# EAGLE board Spresense_PLC _Rev1-01 (EAGLE 9.6.2)
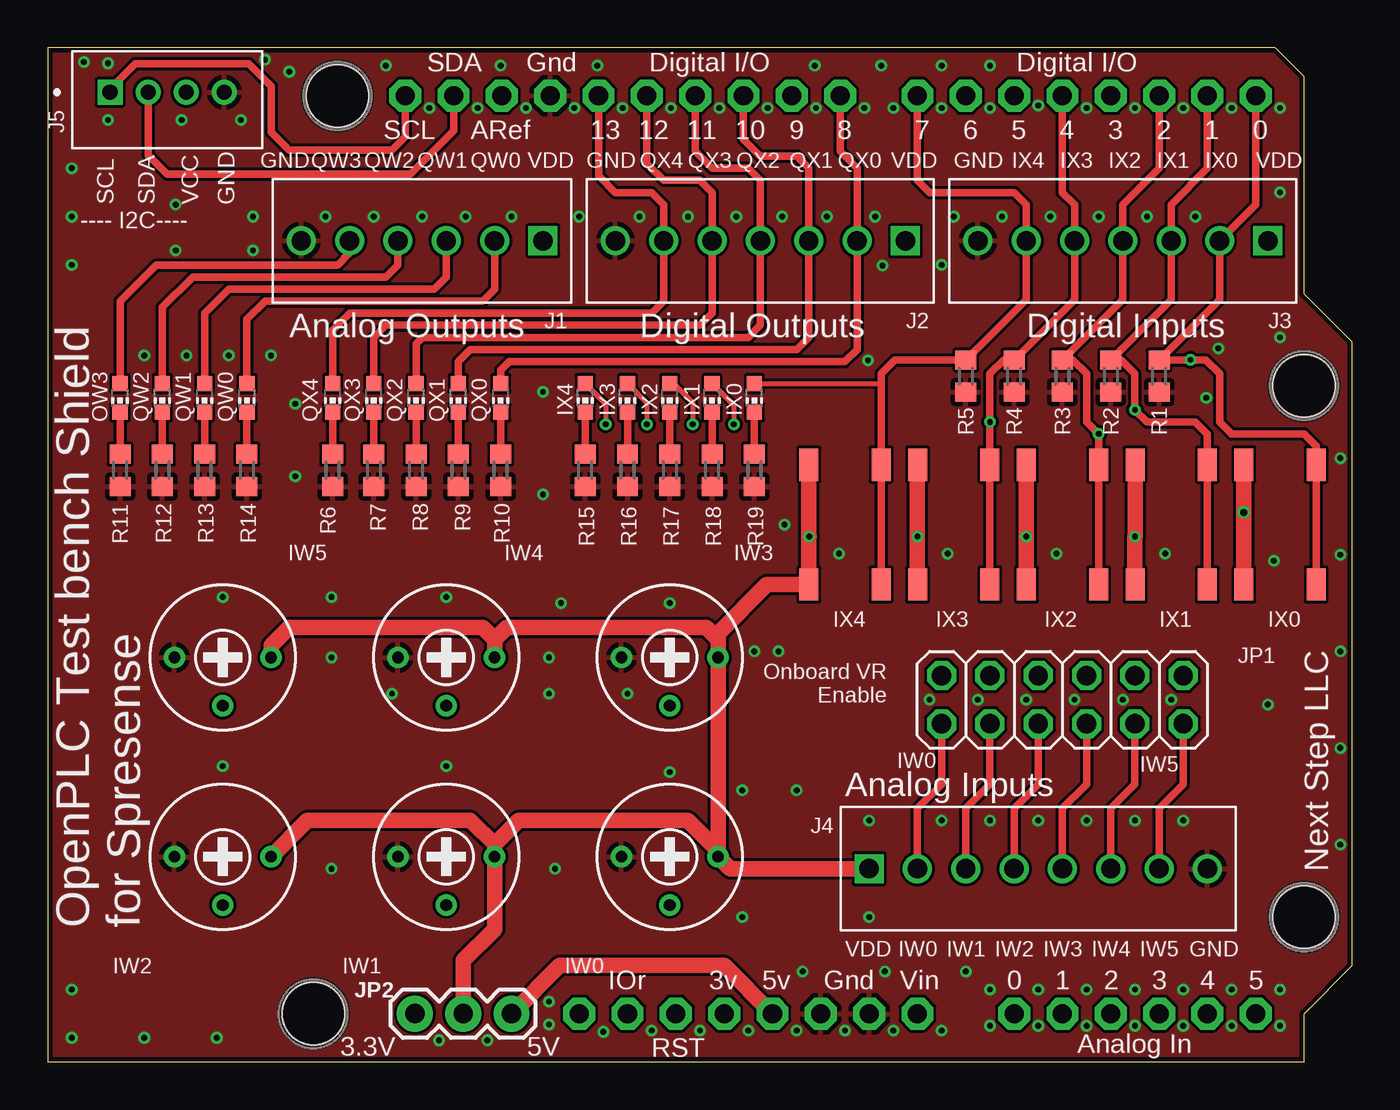
[diagram p0: board, top side]
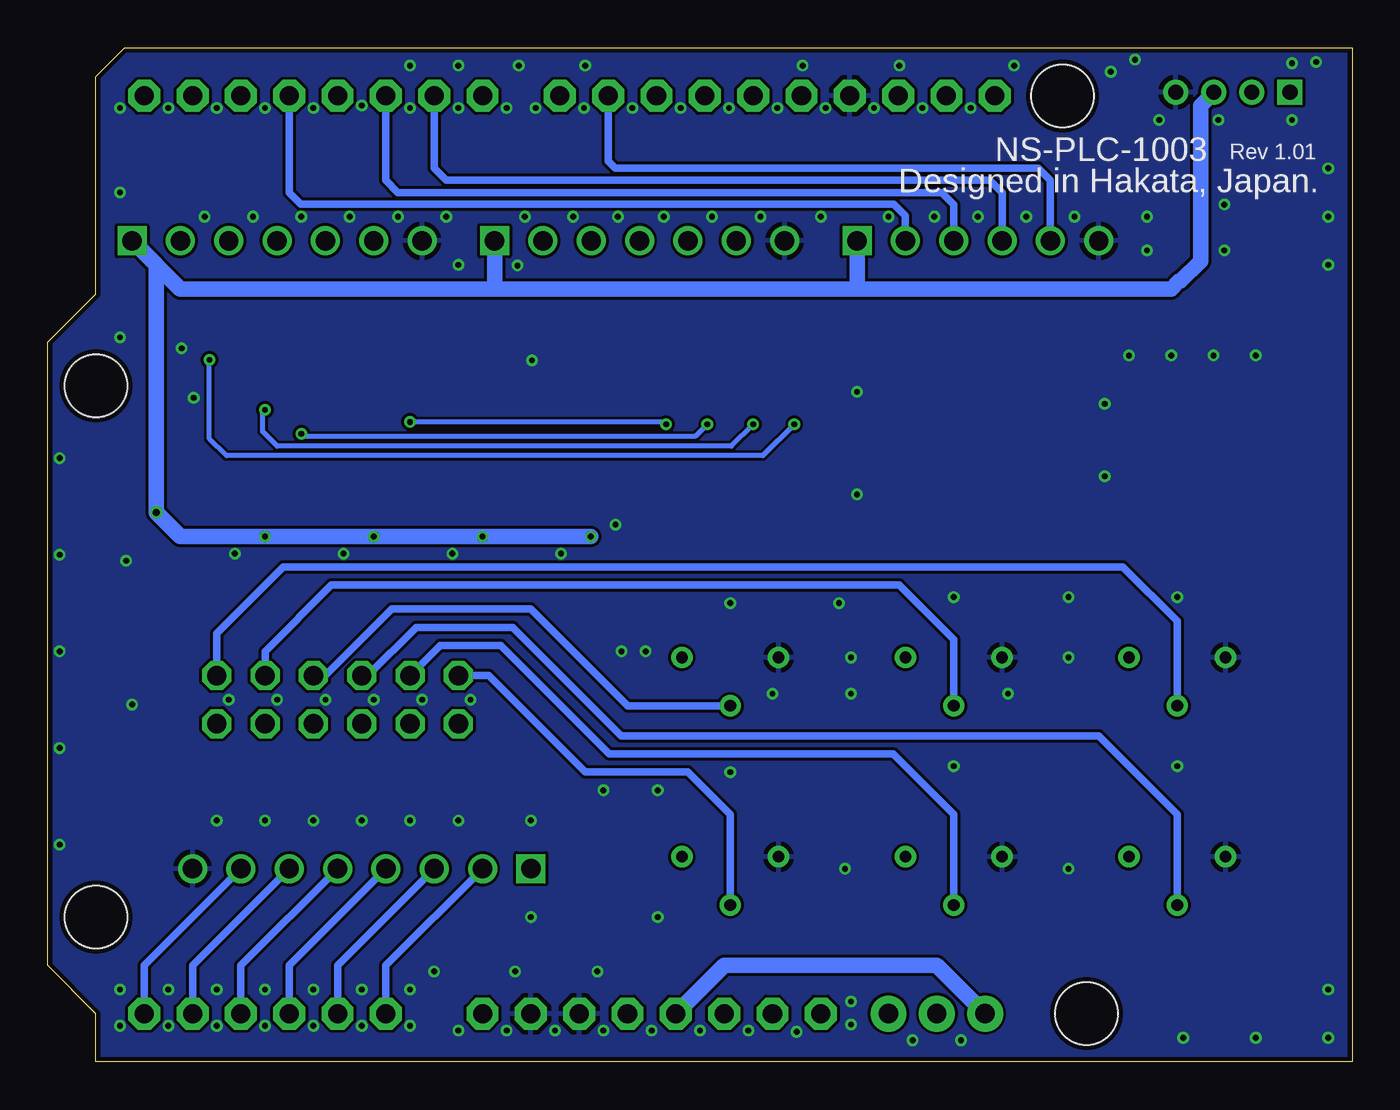
[diagram p1: board, bottom side, seen from below]

Size 68.58 x 53.34 mm. Coordinates in mm from the lower left corner, seen from the top.
Copper layers (1*16): Top 0.035mm / dielectric 1.5mm / Bottom 0.035mm
Design rules "SeeedStudio_2layer_DRU_no_angle_20140221": minimum track width 6mil, minimum drill 12mil, track to track 6mil, track to pad 6mil, pad to pad 6mil, via to via 6mil, smd to smd 0mil, copper to edge 10mil, drill to drill 10mil, minimum pad ring 10mil, minimum via ring 6mil, stop-mask expansion 2mil, vias tented up to drill 100mil, thermal gap 10mil
Holes 3.3 mm at 15.24,50.8 13.97,2.54 66.04,7.62 66.04,35.56

## Footprints (pad centres in the part's own frame; a part is rotated, then mirrored left to right if it is on the bottom)
CHIP-LED0603 = smd 0.8 x 0.8: A 0,-0.75; C 0,0.75
TE_282834-6 = drill 1.016 square: 1 -6.35,0 | drill 1.016: 2 -3.81,0; 3 -1.27,0; 4 1.27,0; 5 3.81,0; 6 6.35,0
TE_282834-7 = drill 1.016 square: 1 -7.62,0 | drill 1.016: 2 -5.08,0; 3 -2.54,0; 4 0,0; 5 2.54,0; 6 5.08,0; 7 7.62,0
HDRV8W85P254_8X1_2078X650X1000 = drill 1.016 square: 1 0,0 | drill 1.016: 2 2.54,0; 3 5.08,0; 4 7.62,0; 5 10.16,0; 6 12.7,0; 7 15.24,0; 8 17.78,0
SEEED_110990030 = drill 0.8 square: 1 -3,0 | drill 0.8: 2 -1,0; 3 1,0; 4 3,0
2X06 = drill 1.016 octagon: 1 -6.35,-1.27; 2 -6.35,1.27; 3 -3.81,-1.27; 4 -3.81,1.27; 5 -1.27,-1.27; 6 -1.27,1.27; 7 1.27,-1.27; 8 1.27,1.27; 9 3.81,-1.27; 10 3.81,1.27; 11 6.35,-1.27; 12 6.35,1.27
1X03 = drill 1.016 pad 1.88: 1 0,0; 2 2.54,0; 3 5.08,0
R0603 = smd 1 x 1.1: 1 -0.85,0; 2 0.85,0
SW_TL3342F160QG/TR = smd 1.7 x 1: 1 -3.15,-1.9; 2 3.15,-1.9; 3 -3.15,1.9; 4 3.15,1.9
ARDUINOR3 = drill 1 pad 1.676 octagon: 3V 35.56,2.54; 5V 38.1,2.54; A0 50.8,2.54; A1 53.34,2.54; A2 55.88,2.54; A3 58.42,2.54; A4 60.96,2.54; A5 63.5,2.54; AREF 23.876,50.8; D0 63.5,50.8; D1 60.96,50.8; D2 58.42,50.8; D3 55.88,50.8; D4 53.34,50.8; D5 50.8,50.8; D6 48.26,50.8; D7 45.72,50.8; D8 41.656,50.8; D9 39.116,50.8; D10 36.576,50.8; D11 34.036,50.8; D12 31.496,50.8; D13 28.956,50.8; GND 26.416,50.8; GND1 43.18,2.54; GND2 40.64,2.54; IOREF 30.48,2.54; RESERVED 27.94,2.54; RESET 33.02,2.54; SCL 18.796,50.8; SDA 21.336,50.8; VIN 45.72,2.54
RTRIM3339P = drill 0.61: 1 -2.54,0; 2 0,-2.54; 3 2.54,0

## Placement (x,y rotation side)
IX0  [CHIP-LED0603]  37.15,34.92 180 top
IX1  [CHIP-LED0603]  34.92,34.92 180 top
IX2  [CHIP-LED0603]  32.7,34.92 180 top
IX3  [CHIP-LED0603]  30.48,34.92 180 top
IX4  [CHIP-LED0603]  28.26,34.92 180 top
J1  282834-6  [TE_282834-6]  19.68,43.18 180 top
J2  282834-7  [TE_282834-7]  37.47,43.18 180 top
J3  282834-7  [TE_282834-7]  56.52,43.18 180 top
J4  282834-8  [HDRV8W85P254_8X1_2078X650X1000]  43.18,10.16 0 top
J5  110990030  [SEEED_110990030]  6.29,50.99 0 top
JP1  [2X06]  53.34,19.05 0 top
JP2  455-1750-1-ND  [1X03]  24.38,2.54 180 top
LED1  [CHIP-LED0603]  17.14,34.92 180 top
LED2  [CHIP-LED0603]  19.37,34.92 180 top
LED3  [CHIP-LED0603]  21.59,34.92 180 top
LED4  [CHIP-LED0603]  23.81,34.92 180 top
LED5  [CHIP-LED0603]  6.03,34.92 180 top
LED6  [CHIP-LED0603]  8.26,34.92 180 top
LED7  [CHIP-LED0603]  10.48,34.92 180 top
OW3  [CHIP-LED0603]  3.81,34.92 180 top
QX4  [CHIP-LED0603]  14.99,34.92 180 top
R1  10k  [R0603]  58.42,36.07 90 top
R2  10k  [R0603]  55.88,36.07 90 top
R3  10k  [R0603]  53.34,36.07 90 top
R4  10k  [R0603]  50.8,36.07 90 top
R5  10k  [R0603]  48.26,36.07 90 top
R6  1k  [R0603]  14.99,31.11 270 top
R7  1k  [R0603]  17.14,31.11 270 top
R8  1k  [R0603]  19.37,31.11 270 top
R9  1k  [R0603]  21.59,31.11 270 top
R10  1k  [R0603]  23.81,31.11 270 top
R11  330  [R0603]  3.81,31.11 270 top
R12  330  [R0603]  6.03,31.11 270 top
R13  330  [R0603]  8.26,31.11 270 top
R14  330  [R0603]  10.48,31.11 270 top
R15  1k  [R0603]  28.26,31.11 90 top
R16  1k  [R0603]  30.48,31.11 90 top
R17  1k  [R0603]  32.7,31.11 90 top
R18  1k  [R0603]  34.92,31.11 90 top
R19  1k  [R0603]  37.15,31.11 90 top
SW1  TL3342F160QG/TR  [SW_TL3342F160QG/TR]  64.77,28.26 90 top
SW2  TL3342F160QG/TR  [SW_TL3342F160QG/TR]  59.05,28.26 90 top
SW3  TL3342F160QG/TR  [SW_TL3342F160QG/TR]  53.34,28.26 90 top
SW4  TL3342F160QG/TR  [SW_TL3342F160QG/TR]  47.62,28.26 90 top
SW5  TL3342F160QG/TR  [SW_TL3342F160QG/TR]  41.91,28.26 90 top
U1  ARDUINOR3-DIMENSION  [ARDUINOR3]  0,0 0 top
VR1  50k  [RTRIM3339P]  9.21,21.27 0 top
VR2  50k  [RTRIM3339P]  20.95,21.27 0 top
VR3  50k  [RTRIM3339P]  32.7,21.27 0 top
VR4  50k  [RTRIM3339P]  9.21,10.79 0 top
VR5  50k  [RTRIM3339P]  20.95,10.79 0 top
VR6  50k  [RTRIM3339P]  32.7,10.79 0 top

## Library data of the parts
IX0 IX1-IX4 LED1-LED7 OW3 QX4 = led
J1 = 282834-6; AVAILABILITY: In Stock; COMMENT: 282834-6; DESCRIPTION: Wire-To-Board Terminal Block, 6, 150 V, 10 A, 30 Awg, 16 Awg, 1.4 Mm; EU_ROHS_COMPLIANCE: Compliant with Exemptions; MF: TE Connectivity; MP: 282834-6; PACKAGE: None; PRICE: None; PURCHASE-URL: https://pricing.snapeda.com/search/part/282834-6/?ref=eda
J2 J3 = 282834-7; AVAILABILITY: In Stock; COMMENT: 282834-7; DESCRIPTION: TERMI-BLOK PCB MOUNT, 90 7P.; EU_ROHS_COMPLIANCE: Compliant with Exemptions; MF: TE Connectivity; MP: 282834-7; PACKAGE: None; PRICE: None; PURCHASE-URL: https://pricing.snapeda.com/search/part/282834-7/?ref=eda
J4 = 282834-8; AVAILABILITY: In Stock; COMMENT: 282834-8; DESCRIPTION: Buchanan; Conn; Term Blk; PCB; 8; 2.54mm; Front; 30-16 AWG; Green; 10 A; 150 V; EU_ROHS_COMPLIANCE: Compliant with Exemptions; MF: TE Connectivity; MP: 282834-8; PACKAGE: None; PRICE: None; PURCHASE-URL: https://pricing.snapeda.com/search/part/282834-8/?ref=eda
J5 = 110990030; AVAILABILITY: Good; DESCRIPTION: GROVE 2MM 4PIN VERT CONN 10PCS; MF: Seeed Technology Co., Ltd; MP: 110990030; PACKAGE: None; PRICE: None; PURCHASE-URL: https://pricing.snapeda.com/search/part/110990030/?ref=eda
JP1 = pinhead
JP2 = SparkFun-Connectors; PROD_ID: XXX-00000
R1-R19 = rcl; SPICEPREFIX: R
SW1-SW5 = TL3342F160QG_TR; AVAILABILITY: In Stock; DESCRIPTION: Tactile Switch SPST-NO Top Actuated Surface Mount; MF: E-Switch; MP: TL3342F160QG/TR; PACKAGE: None; PRICE: None; PURCHASE-URL: https://pricing.snapeda.com/search/part/TL3342F160QG/TR/?ref=eda
U1 = adafruit
VR1-VR6 = rcl; SPICEMODEL: X; SPICEPREFIXL: POT

## Nets
A0: J4.2 JP1.1 U1.A0
A1: J4.3 JP1.3 U1.A1
A2: J4.4 JP1.5 U1.A2
A3: J4.5 JP1.7 U1.A3
A4: J4.6 JP1.9 U1.A4
A5: J4.7 JP1.11 U1.A5
D0: IX4.A J3.2 R1.2 SW1.1 SW1.2 U1.D0
D1: IX3.A J3.3 R2.2 SW2.1 SW2.2 U1.D1
D2: IX2.A J3.4 R3.2 SW3.1 SW3.2 U1.D2
D5: IX1.A J3.5 R4.2 SW4.1 SW4.2 U1.D4
D6: IX0.A J3.6 R5.2 SW5.1 SW5.2 U1.D7
D8: J2.2 LED4.A U1.D8
D9: J1.5 OW3.A U1.D9
D10: J2.3 LED3.A U1.D10
D11: J2.4 LED2.A U1.D11
D12: J2.5 LED1.A U1.D12
D13: J2.6 QX4.A U1.D13
GND: J1.6 J2.7 J3.7 J4.8 J5.4 R1.1 R2.1 R3.1 R4.1 R5.1 R6.2 R7.2 R8.2 R9.2 R10.2 R11.2 R12.2 R13.2 R14.2 R15.1 R16.1 R17.1 R18.1 R19.1 U1.GND U1.GND1 U1.GND2 VR1.1 VR2.1 VR3.1 VR4.1 VR5.1 VR6.1
N$1: LED1.C R7.1
N$2: LED2.C R8.1
N$3: LED3.C R9.1
N$4: LED4.C R10.1
N$5: LED5.C R12.1
N$6: LED6.C R13.1
N$7: LED7.C R14.1
N$8: JP1.12 VR1.2
N$9: JP1.10 VR2.2
N$10: JP1.8 VR3.2
N$11: JP1.6 VR4.2
N$12: JP1.4 VR5.2
N$13: JP1.2 VR6.2
N$14: JP2.3 U1.3V
N$15: J1.2 LED7.A U1.D3
N$16: JP2.1 U1.5V
N$17: IX0.C R19.2
N$18: IX1.C R18.2
N$19: IX2.C R17.2
N$20: IX3.C R16.2
N$21: IX4.C R15.2
N$22: J1.3 LED6.A U1.D5
N$23: J1.4 LED5.A U1.D6
N$25: OW3.C R11.1
N$26: QX4.C R6.1
SCL: J5.1 U1.SCL
SDA: J5.2 U1.SDA
VCC: J1.1 J2.1 J3.1 J4.1 J5.3 JP2.2 SW1.3 SW1.4 SW2.3 SW2.4 SW3.3 SW3.4 SW4.3 SW4.4 SW5.3 SW5.4 VR1.3 VR2.3 VR3.3 VR4.3 VR5.3 VR6.3
VIN: U1.VIN

## Tracks (layer width: path | path; a pad name or v marks a point on that pad's centre or on a via)
A0
  Top 0.406: JP1.1 46.99,14.61 45.72,13.34 J4.2
  Bottom 0.406: J4.2 50.8,5.08 U1.A0
A1
  Top 0.406: JP1.3 49.53,14.61 48.26,13.34 J4.3
  Bottom 0.406: J4.3 53.34,5.08 U1.A1
A2
  Top 0.406: JP1.5 52.07,14.61 50.8,13.34 J4.4
  Bottom 0.406: J4.4 55.88,5.08 U1.A2
A3
  Top 0.406: JP1.7 54.61,14.61 53.34,13.34 J4.5
  Bottom 0.406: J4.5 58.42,5.08 U1.A3
A4
  Top 0.406: JP1.9 57.15,14.61 55.88,13.34 J4.6
  Bottom 0.406: J4.6 60.96,5.08 U1.A4
A5
  Top 0.406: JP1.11 59.69,14.61 58.42,13.34 J4.7
  Bottom 0.406: J4.7 63.5,5.08 U1.A5
D0  (via drill 0.3)
  Top 0.254: IX4.A 29.34,34.6 v29.34,33.53
  Top 0.406: U1.D0 63.5,45.09 J3.2 61.59,40.09 R1.2 v60.07,36.92 60.87,36.92 61.59,36.2 61.59,33.66 62.23,33.02 66.04,33.02 66.67,32.38 SW1.2 SW1.1
  Bottom 0.254: v29.34,33.53 30.99,31.88 59.18,31.88 60.07,32.77 v60.07,36.92
D1  (via drill 0.3)
  Top 0.254: IX3.A 31.5,34.66 v31.5,33.53
  Top 0.406: U1.D1 60.96,46.99 59.05,45.09 J3.3 59.05,40.09 R2.2 56.43,36.92 57.15,36.2 v57.15,34.29 57.78,33.66 60.33,33.66 60.96,33.02 60.95,33.02 SW2.2 SW2.1
  Bottom 0.254: v31.5,33.53 32.64,32.38 56.52,32.38 57.28,33.15 57.28,34.16 v57.15,34.29
D2  (via drill 0.3)
  Top 0.254: IX2.A 32.91,35.67 33.91,34.67 v33.91,33.53
  Top 0.406: U1.D2 58.42,46.99 56.52,45.09 J3.4 56.52,40.09 R3.2 53.89,36.92 54.61,36.2 54.61,33.66 v55.24,33.02 SW3.2 SW3.1
  Bottom 0.254: v33.91,33.53 34.54,32.89 55.11,32.89 v55.24,33.02
D5  (via drill 0.3)
  Top 0.254: IX1.A 36.07,34.53 v36.07,33.53
  Top 0.406: U1.D4 53.34,45.72 53.98,45.09 J3.5 53.98,40.09 R4.2 50.25,36.92 49.53,36.2 v49.53,33.66 SW4.2 SW4.1
  Bottom 0.254: v36.07,33.53 36.2,33.66 v49.53,33.66
D6
  Top 0.254: IX0.A 43.7,35.67 43.81,35.56
  Top 0.406: U1.D7 45.72,46.35 46.35,45.72 50.8,45.72 51.44,45.09 J3.6 51.44,40.09 R5.2 44.54,36.92 43.81,36.19 43.81,35.56 SW5.2 SW5.1
D8
  Top 0.406: U1.D8 41.66,47.88 42.55,46.99 J2.2 42.55,37.47 41.91,36.83 24.26,36.83 23.81,36.39 LED4.A
D9
  Top 0.406: OW3.A 3.81,40.01 5.71,41.91 15.24,41.91 15.88,42.55 J1.5
  Bottom 0.406: J1.5 15.88,46.35 16.51,46.99 38.73,46.99 39.12,47.37 U1.D9
D10
  Top 0.406: U1.D10 36.58,48.51 37.47,47.62 39.37,47.62 40.01,46.99 J2.3 40.01,38.1 39.37,37.47 22.23,37.47 21.59,36.83 LED3.A
D11
  Top 0.406: U1.D11 34.04,47.88 34.92,46.99 36.83,46.99 37.47,46.35 J2.4 37.47,38.73 36.83,38.1 19.68,38.1 19.37,37.78 LED2.A
D12
  Top 0.406: U1.D12 31.5,47.24 32.38,46.35 34.29,46.35 34.92,45.72 J2.5 34.92,39.37 34.29,38.73 17.78,38.73 17.14,38.1 LED1.A
D13
  Top 0.406: U1.D13 28.96,46.61 29.84,45.72 31.75,45.72 32.38,45.09 J2.6 32.38,40.01 31.75,39.37 15.88,39.37 14.99,38.48 QX4.A
GND  (via drill 0.3)
  other vias: 12.7,52.07 11.43,52.7 3.17,52.51 1.91,52.58 1.27,46.99 1.27,44.45 1.27,41.91 1.27,3.81 1.27,1.27 5.08,1.27 8.89,1.27 20.57,1.14 23.11,1.14 26.35,1.97 29.21,1.59 31.75,1.65 34.29,1.65 36.83,1.65 39.37,1.65 41.91,1.65 44.45,1.65 46.99,1.65 39.69,4.76 44.01,4.76 48.26,4.76 49.53,3.81 49.53,1.91 52.07,3.81 52.07,1.91 54.61,1.91 54.61,3.81 57.15,1.91 57.15,3.81 59.69,3.81 59.69,1.91 62.23,3.81 62.23,1.91 64.77,3.81 64.77,1.91 39.37,14.29 43.18,12.7 46.99,12.7 49.53,12.7 52.07,12.7 54.61,12.7 57.15,12.7 59.69,12.7 67.94,11.43 67.94,16.51 67.94,21.59 67.94,26.67 67.94,31.75 64.77,38.1 64.77,45.72 64.77,50.16 62.23,50.16 59.69,50.16 57.15,50.16 54.61,50.16 52.07,50.29 49.53,50.16 46.99,50.16 44.45,50.16 42.93,50.16 40.39,50.16 37.85,50.16 35.31,50.16 32.77,50.16 30.23,50.16 27.69,50.16 25.15,50.16 22.61,50.16 20.07,50.16 6.73,45.09 10.79,44.45 14.61,44.45 17.14,44.45 19.68,44.45 21.97,44.45 24.38,44.45 27.94,44.45 31.11,44.45 33.66,44.45 36.2,44.45 38.61,44.45 43.5,44.45 47.62,44.45 50.16,44.45 52.7,44.45 55.24,44.45 57.78,44.45 60.33,44.45 46.99,41.91 10.79,42.67 6.73,42.67 64.14,18.8 38.42,21.59 30.48,19.37 18.1,19.37 26.35,3.17 43.88,41.88 40.96,44.45 64.45,26.35 58.74,26.73 53.02,26.73 47.31,26.73 41.59,26.73 43.12,36.89 26.04,29.84 13.02,30.8 10.16,49.53 7.05,49.53 3.17,49.53 49.53,52.39 46.99,52.39 43.81,52.39 40.32,52.39 28.89,52.39 23.81,52.39 17.78,52.39 36.51,7.62 36.51,14.29 26.35,19.37 37.15,21.59 5.08,37.15 7.3,37.15 9.53,37.15 11.75,37.15 13.02,34.61 26.04,35.24 38.73,28.26 9.21,24.45 14.92,24.45 14.92,21.27 20.95,24.45 26.99,24.13 26.35,21.27 32.7,24.13 9.21,15.56 20.95,15.56 32.7,15.24 14.92,10.16 26.67,10.16 43.18,7.62 61.53,37.53 60.9,34.92 46.35,19.05 48.9,19.05 51.44,19.05 53.98,19.05 56.52,19.05 59.05,19.05
  pour Top: 0,53.34 64.64,53.34 66.04,51.94 66.04,40.26 68.45,37.85 68.58,37.85 68.58,5.08 66.17,2.67 66.17,2.41 66.04,2.29 66.04,0 0,0
  pour Bottom: 0,53.34 64.77,53.34 66.04,52.07 66.04,40.64 68.58,38.1 68.58,5.08 66.04,2.54 66.04,0 0,0
N$1
  Top 0.406: R7.1 LED1.C
N$2
  Top 0.406: LED2.C R8.1
N$3
  Top 0.406: LED3.C R9.1
N$4
  Top 0.406: LED4.C R10.1
N$5
  Top 0.406: LED5.C R12.1
N$6
  Top 0.406: LED6.C R13.1
N$7
  Top 0.406: LED7.C R14.1
N$8
  Bottom 0.406: JP1.12 59.69,22.54 56.2,26.04 12.06,26.04 9.21,23.18 VR1.2
N$9
  Bottom 0.406: JP1.10 57.15,21.59 53.66,25.08 23.81,25.08 20.95,22.23 VR2.2
N$10
  Bottom 0.406: JP1.8 53.98,20.32 50.48,23.81 43.18,23.81 38.1,18.73 VR3.2
N$11
  Bottom 0.406: JP1.6 51.75,20.32 49.21,22.86 44.13,22.86 38.42,17.14 13.34,17.14 9.21,13.02 VR4.2
N$12
  Bottom 0.406: JP1.4 47.94,21.91 44.77,21.91 39.05,16.19 24.13,16.19 20.95,13.02 VR5.2
N$13
  Bottom 0.406: JP1.2 45.4,20.32 40.32,15.24 34.92,15.24 32.7,13.02 VR6.2
N$14
  Bottom 0.813: U1.3V 33.02,5.08 21.84,5.08 JP2.3
N$15
  Top 0.406: LED7.A 10.48,39.05 11.43,40.01 22.86,40.01 23.5,40.64 J1.2
  Bottom 0.406: U1.D3 55.88,45.72 55.27,45.11 24.11,45.11 23.5,44.49 J1.2
N$16
  Top 0.813: U1.5V 35.56,5.08 26.92,5.08 JP2.1
N$17
  Top 0.406: IX0.C R19.2
N$18
  Top 0.406: IX1.C R18.2
N$19
  Top 0.406: IX2.C R17.2
N$20
  Top 0.406: IX3.C R16.2
N$21
  Top 0.406: IX4.C R15.2
N$22
  Top 0.406: LED6.A 8.26,39.37 9.53,40.64 20.32,40.64 20.95,41.27 J1.3
  Bottom 0.406: J1.3 20.95,45.09 21.59,45.72 50.16,45.72 50.8,46.35 U1.D5
N$23
  Top 0.406: LED5.A 6.03,39.69 7.62,41.27 17.78,41.27 18.41,41.91 J1.4
  Bottom 0.406: J1.4 18.41,45.72 19.05,46.35 47.62,46.35 48.26,46.99 U1.D6
N$25
  Top 0.406: OW3.C R11.1
N$26
  Top 0.406: QX4.C R6.1
SCL
  Top 0.406: J5.1 3.29,51.17 4.61,52.49 10.57,52.49 11.75,51.31 11.75,48.9 12.7,47.94 18.1,47.94 18.8,48.64 U1.SCL
SDA
  Top 0.406: J5.2 5.29,47.69 6.3,46.67 19.05,46.67 21.34,48.96 U1.SDA
VCC  (via drill 0.3, 0.35)
  Top 0.406: SW4.3
  Top 0.813: VR6.3 35.88,10.16 J4.1 | VR4.3 13.65,12.7 22.23,12.7 23.5,11.43 | 23.5,11.43 VR5.3 23.5,6.99 21.84,5.33 JP2.2 | 23.5,11.43 24.77,12.7 33.66,12.7 35.24,11.11 VR6.3 | 35.24,22.23 35.24,22.54 37.81,25.11 SW5.3 40.01,27.6 | 35.24,22.23 VR3.3 VR6.3 | VR1.3 11.75,21.91 12.7,22.86 22.86,22.86 23.5,22.23 | VR2.3 23.5,22.23 | 23.5,22.23 24.13,22.86 34.61,22.86 35.24,22.23 | 40.01,27.6 v40.03,27.62 | SW5.4 40.01,27.6 | SW4.4 v45.72,27.62 SW4.3 | SW3.4 v51.44,27.63 v51.44,27.62 SW3.3 | SW2.4 v57.16,27.63 v57.15,27.62 SW2.3 | SW1.4 v62.87,28.9 v62.87,28.89 SW1.3
  Bottom 0.813: v40.03,27.62 v45.72,27.62 v51.44,27.62 v57.15,27.62 61.59,27.62 v62.87,28.89 62.87,41.91 J3.1 61.59,40.64 45.09,40.64 | J5.3 7.99,50.29 7.99,42.1 9.04,41.05 9.12,41.05 9.53,40.64 26.04,40.64 | 26.04,40.64 45.09,40.64 | J2.1 45.09,40.64 | J1.1 26.04,40.64

## Text on the board
tPlace: GND | QW3 | QW2 | QW1 | QW0 | VDD | GND | QX4 | QX3 | QX2 | QX1 | QX0 | VDD | GND | IX4 | IX3 | IX2 | IX1 | IX0 | VDD | SCL | SDA | VCC | GND | ---- I2C---- | Analog Outputs | Digital Outputs | Digital Inputs | QW2 | QW1 | QW0 | QX3 | QX2 | QX1 | QX0 | IW5 | IW4 | IW3 | IX4 | IX3 | IX2 | IX1 | IX0 | Onboard VR / Enable | IW0 | IW5 | Analog Inputs | Next Step LLC | OpenPLC Test bench Shield / for Spresense | VDD | IW0 | IW1 | IW2 | IW3 | IW4 | IW5 | GND | IW2 | IW1 | IW0 | 3.3V | 5V
bPlace: NS-PLC-1003 | Designed in Hakata, Japan. | Rev 1.01